# EAGLE board ILX544A_V2_B1 (EAGLE 6.2)
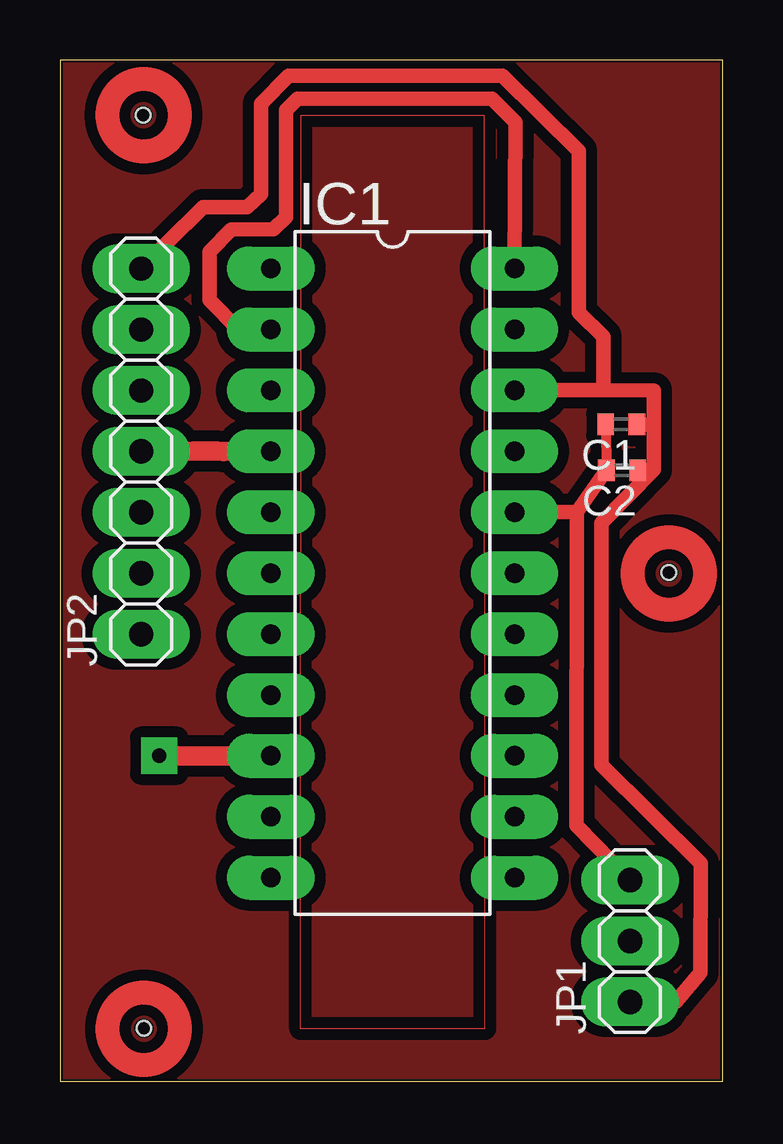
[diagram p0: board, top side]
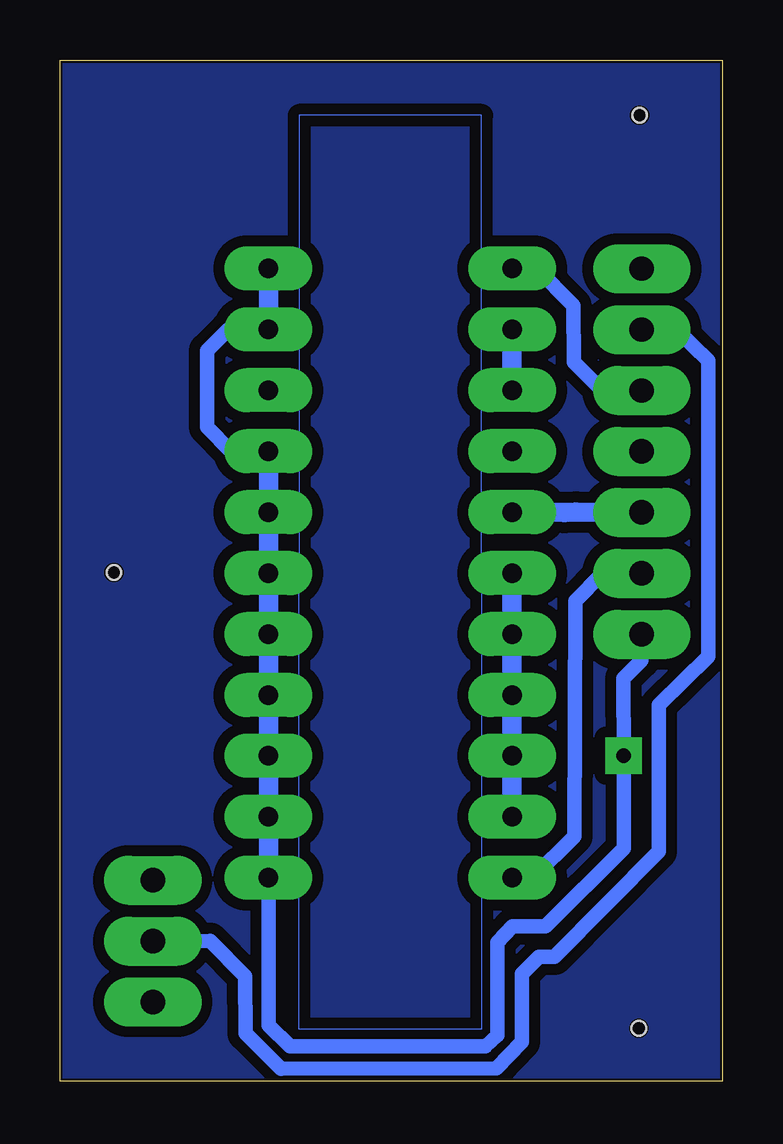
[diagram p1: board, bottom side, seen from below]

Size 27.62 x 42.57 mm. Coordinates in mm from the lower left corner, seen from the top.
Outline: 0,0 27.62,0 27.62,42.57 0,42.57 0,0
Copper layers (1*16): Top 0.035mm / dielectric 1.5mm / Bottom 0.035mm
Design rules: minimum track width 10mil, minimum drill 24mil, track to track 18mil, track to pad 18mil, pad to pad 8mil, via to via 8mil, smd to smd 8mil, copper to edge 0.1mm, drill to drill 8mil, minimum pad ring 20mil, minimum via ring 18mil, stop-mask expansion 4mil, vias tented up to drill 0mil, thermal gap 10mil
Holes 0.6 mm at 3.45,40.27 3.48,2.2 25.37,21.2

## Footprints (pad centres in the part's own frame; a part is rotated, then mirrored left to right if it is on the bottom)
C0402 = smd 0.7 x 0.9: 1 -0.65,0; 2 0.65,0
DIL22-4 = drill 0.813 long: 1 -12.7,-5.08; 2 -10.16,-5.08; 3 -7.62,-5.08; 4 -5.08,-5.08; 5 -2.54,-5.08; 6 0,-5.08; 7 2.54,-5.08; 8 5.08,-5.08; 9 7.62,-5.08; 10 10.16,-5.08; 11 12.7,-5.08; 12 12.7,5.08; 13 10.16,5.08; 14 7.62,5.08; 15 5.08,5.08; 16 2.54,5.08; 17 0,5.08; 18 -2.54,5.08; 19 -5.08,5.08; 20 -7.62,5.08; 21 -10.16,5.08; 22 -12.7,5.08
1X03 = drill 1.016 long: 1 -2.54,0; 2 0,0; 3 2.54,0
1X07 = drill 1.016 long: 1 -7.62,0; 2 -5.08,0; 3 -2.54,0; 4 0,0; 5 2.54,0; 6 5.08,0; 7 7.62,0

## Placement (x,y rotation side)
C1  0.01uF  [C0402]  23.38,27.38 180 top
C2  0.01uF  [C0402]  23.41,25.47 180 top
IC1  ILX544A  [DIL22-4]  13.85,21.18 270 top
JP1  SensorTemp  [1X03]  23.75,5.84 90 top
JP2  Control  [1X07]  3.36,26.25 90 top

## Library data of the parts
C1 C2 = eagle-ltspice; SPICEMODEL: NONE; SPICEPREFIX: C
IC1 = ic-package
JP1 JP2 = pinhead

## Nets
N$1: IC1.5 JP2.3
N$2: C1.1 C2.1 IC1.20 JP1.1 JP2.7
N$3: IC1.1 JP2.5
N$4: IC1.4 JP2.4
N$6: IC1.11 JP2.2
N$14: JP1.2 JP2.6
N$15: C1.2 C2.2 IC1.2 IC1.3 IC1.6 IC1.7 IC1.8 IC1.9 IC1.10 IC1.12 IC1.13 IC1.14 IC1.15 IC1.16 IC1.17 IC1.18 IC1.19 IC1.21 IC1.22 JP1.3 JP2.1

## Tracks (layer width: path | path; a pad name or v marks a point on that pad's centre or on a via)
N$1
  Bottom 0.813: IC1.5 7.91,23.73 6.58,23.71 6.12,23.73 JP2.3
N$2
  Top 0.61: 24.74,27.37 24.74,25.49 | 24.74,27.37 C1.1 | 24.74,25.49 C2.1 | JP1.1 25.66,3.3 26.67,4.51 26.69,9.08 22.56,13.18 22.55,23.26 24.74,25.49 | 22.63,28.8 IC1.20 | JP2.7 4.43,34.93 4.42,34.94 5.94,36.43 7.79,36.43 8.36,36.98 8.36,40.75 9.51,41.91 18.42,41.91 21.61,38.77 21.61,32.04 22.63,31.03 22.63,28.8 | 22.63,28.8 24.75,28.79 24.74,27.37
N$3
  Bottom 0.61: IC1.1 7.74,33.87 6.21,32.33 6.2,29.98 4.99,28.76 JP2.5
N$4
  Top 0.813: IC1.4 7.63,26.26 6.81,26.25 6.52,26.26 5.56,26.26 JP2.4
N$5
  Bottom 0.05: 17.65,40.26 17.68,2.19 10.02,2.19 10.04,40.26 17.65,40.26
N$6
  Bottom 0.61: IC1.11 7.91,8.49 6.17,10.21 6.13,20.02 5.02,21.15 JP2.2
N$7
  Top 0.05: 17.65,40.26 17.68,2.19 10.02,2.19 10.04,40.26 17.65,40.26
N$8
  pour Bottom: 10.04,40.26 17.65,40.26 17.68,2.19 10.02,2.2
N$9
  pour Bottom: -0.05,42.62 27.67,42.62 27.67,-0.05 -0.05,-0.05
N$10
  pour Top: 10.04,40.26 17.65,40.26 17.68,2.19 10.02,2.19
N$11
  pour Top: -0.05,42.62 27.66,42.62 27.67,-0.05 -0.05,-0.05
N$14
  Bottom 0.61: JP1.2 21.36,5.85 19.9,4.38 19.88,1.99 18.41,0.51 9.42,0.53 8.36,1.64 8.37,4.48 7.66,5.18 7.01,5.19 2.66,9.59 2.65,15.68 0.59,17.71 0.59,30.04 1.94,31.36 JP2.6
N$15  (via drill 0.6)
  Top 0.406: C1.2 22.75,27.3 C2.2
  Top 0.61: IC1.18 21.53,23.72 | 21.53,23.72 21.51,10.66 JP1.3 | 21.53,23.72 C2.2 | IC1.2 7.43,31.34 6.22,32.55 6.21,34.59 7.12,35.5 8.89,35.51 9.4,36.02 9.4,40.48 9.89,40.96 18,40.96 18.96,39.97 IC1.22
  Top 0.813: v4.12,13.57 5.01,13.56 IC1.9
  Bottom 0.61: JP2.1 3.38,17.54 4.13,16.8 v4.12,13.57 4.12,9.71 7.38,6.45 8.75,6.46 9.39,5.79 9.39,1.91 9.88,1.45 18.02,1.45 18.92,2.34 IC1.12 | IC1.21 20.61,31.34 21.48,30.45 21.49,27.27 20.51,26.27 IC1.19
  Bottom 0.813: IC1.21 IC1.22 | IC1.3 IC1.2 | IC1.6 IC1.7 IC1.8 IC1.9 IC1.10 | IC1.12 IC1.13 IC1.14 IC1.15 IC1.16 IC1.17 IC1.18 IC1.19
(copper drawn outside any net)
  shapes: Top circle x3